# Altium PCB VET6_Coreboard.PcbDoc
Units mil, origin at the board's own origin, x right, y up, seen from the top; angles counter-clockwise.
Board outline 6000 x 4000 mil, 2 copper layers (Top Layer, Bottom Layer); 19 components, 22 nets, 136 pads, 0 vias.
Unrouted connection lines stored in the file: 46.
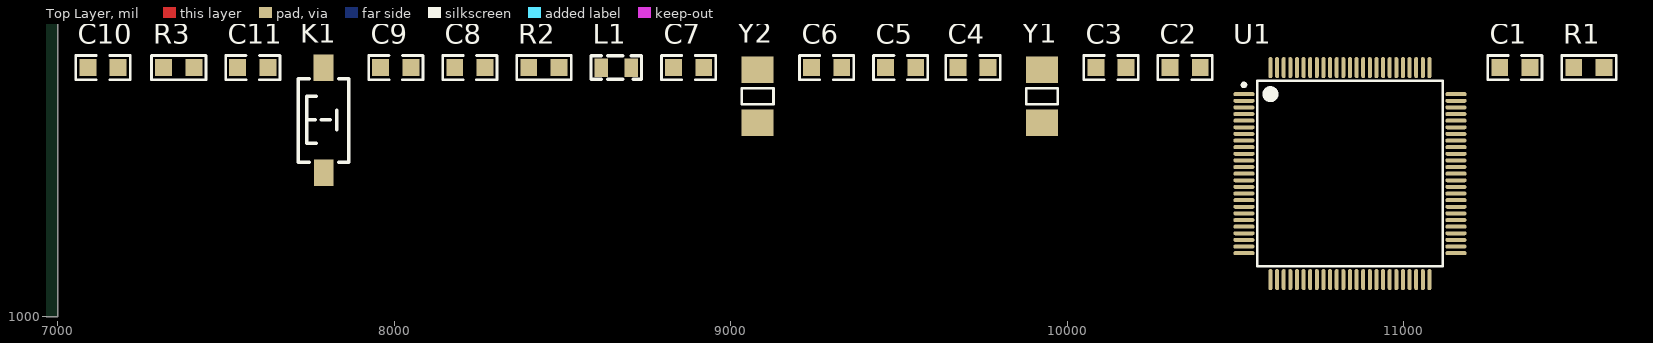
[diagram p0: Top Layer view]
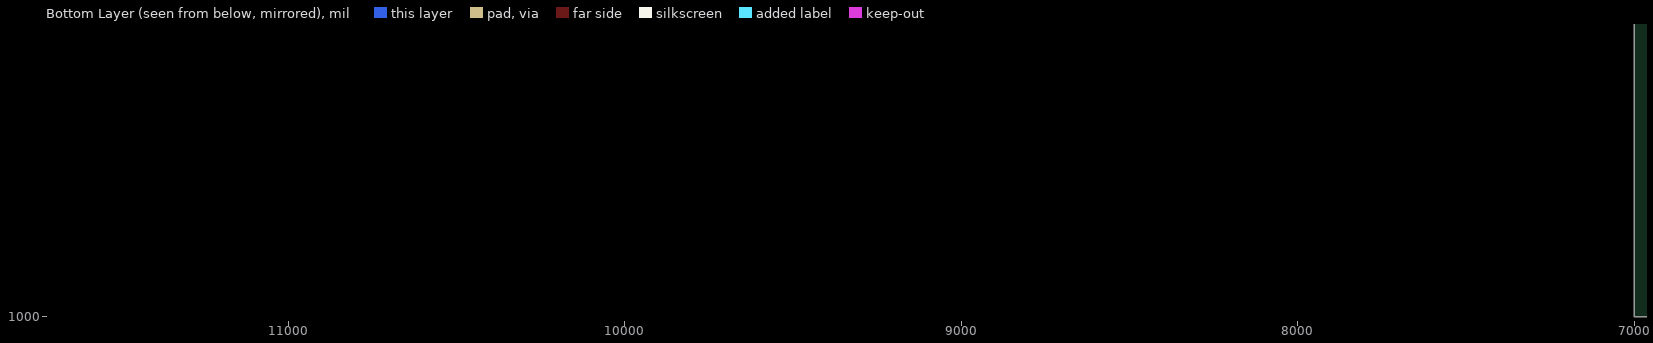
[diagram p1: Bottom Layer view, seen from below]

## Layer stack, top to bottom
Top Solder: solder mask 0.4, Solder Resist, Dk 3.5
Top Layer: signal copper 1.4
Dielectric 1: dielectric 12.6, FR-4, Dk 4.8
Bottom Layer: signal copper 1.4
Bottom Solder: solder mask 0.4, Solder Resist, Dk 3.5

## Board outline
1000,1000 7000,1000 7000,5000 1000,5000

## Design rules (kind name [scope] priority, off if disabled: settings)
Clearance [All] p1: gap=10
PolygonConnect [All] p1: connectstyle=Relief reliefconductorwidth=10 reliefentries=4 polygonreliefangle="90 Angle" airgapwidth=10
RoomDefinition VET6_Coreboard [InComponentClass('VET6_Coreboard')] p1: confinementstyle=ConfineIn formatcopy=TRUE lockcomponents=FALSE outline 7045,1060 11640,1060 11640,1890 7045,1890
RoutingVias [All] p1: holewidth=28 width=50 viastyle="Through Hole" minholewidth=28 minwidth=50 maxholewidth=28 maxwidth=50
SolderMaskExpansion [All] p1: expansion=4
Width [All] p1: maxlimit=10 minlimit=10 preferedwidth=10
30 further rules are at their usual default settings.

## Components (designator, comment, footprint, x,y, rotation, side; value= is the part's Value field where it differs from the comment)
C1 "104" "C 0805" 11330,1740 r0 top
C2 "104" "C 0805" 10350,1740 r0 top
C3 "22pf" "C 0805" 10130,1740 r0 top
C4 "22pf" "C 0805" 9720,1740 r0 top
C5 "104" "C 0805" 9505,1740 r0 top
C6 "22pf" "C 0805" 9285,1740 r0 top
C7 "22pf" "C 0805" 8875,1740 r0 top
C8 "104" "C 0805" 8225,1740 r0 top
C9 "104" "C 0805" 8005,1740 r0 top
C10 "104" "C 0805" 7135,1740 r0 top
C11 "104" "C 0805" 7580,1740 r0 top
K1 "Key" "KEY 3.6*2.5 SMD" 7790,1585 r90 top
L1 "100uH" "L 0805" 8660,1740 r0 top
R1 "10k" "R 0805" 11550,1740 r0 top
R2 "10k" "R 0805" 8445,1740 r0 top
R3 "10k" "R 0805" 7360,1740 r0 top
U1 "STM32F103VET6" TQFP100N50P14X14X1.2 10840,1425 r0 top
Y1 "32.768KHz" XTAL-5032 9925,1655 r90 top
Y2 "8MKz" XTAL-5032 9080,1655 r90 top

## Footprints (in the part's own frame and the unit in brackets; to place one, negate y for a bottom-side part, rotate by r counter-clockwise, add the part's x,y. Pads: shape width x height; smd on the part's side, far side on the other; paste and mask are expansions set on the pad)
"C 0805" [mil]
  rect 50x50 smd: 1(-45,0) 2(45,0)
  silkscreen extent -81,-36 81,36, body extent -39,-24 39,24, height 20
"KEY 3.6*2.5 SMD" [mm]
  rect 2x1.5 smd: 1(-3.996,-0.02) 2(3.937,0)
  silkscreen extent -3.21,-1.9 3.09,1.9, body extent -4,-1.88 4,1.62, height 2.59
"L 0805" [mil]
  rect 40x55 smd: 1(-45,0) 2(45,0)
  silkscreen extent -75,-35 75,35, body extent -39,-24 39,24, height 35
"R 0805" [mil]
  rect 50x50 smd: 1(-45,0) 2(45,0)
  silkscreen extent -81,-36 81,36, body extent -39,-25 39,25, height 20
TQFP100N50P14X14X1.2 [mm]
  oval 1.6x0.3 smd: 1(-8,6) 2(-8,5.5) 3(-8,5) 4(-8,4.5) 5(-8,4) 6(-8,3.5) 7(-8,3) 8(-8,2.5) 9(-8,2) 10(-8,1.5) 11(-8,1) 12(-8,0.5) 13(-8,0) 14(-8,-0.5) 15(-8,-1) 16(-8,-1.5) 17(-8,-2) 18(-8,-2.5) 19(-8,-3) 20(-8,-3.5) 21(-8,-4) 22(-8,-4.5) 23(-8,-5) 24(-8,-5.5) 25(-8,-6) 51(8,-6) 52(8,-5.5) 53(8,-5) 54(8,-4.5) 55(8,-4) 56(8,-3.5) 57(8,-3) 58(8,-2.5) 59(8,-2) 60(8,-1.5) 61(8,-1) 62(8,-0.5) 63(8,0) 64(8,0.5) 65(8,1) 66(8,1.5) 67(8,2) 68(8,2.5) 69(8,3) 70(8,3.5) 71(8,4) 72(8,4.5) 73(8,5) 74(8,5.5) 75(8,6)
  oval 0.3x1.6 smd: 26(-6,-8) 27(-5.5,-8) 28(-5,-8) 29(-4.5,-8) 30(-4,-8) 31(-3.5,-8) 32(-3,-8) 33(-2.5,-8) 34(-2,-8) 35(-1.5,-8) 36(-1,-8) 37(-0.5,-8) 38(0,-8) 39(0.5,-8) 40(1,-8) 41(1.5,-8) 42(2,-8) 43(2.5,-8) 44(3,-8) 45(3.5,-8) 46(4,-8) 47(4.5,-8) 48(5,-8) 49(5.5,-8) 50(6,-8) 76(6,8) 77(5.5,8) 78(5,8) 79(4.5,8) 80(4,8) 81(3.5,8) 82(3,8) 83(2.5,8) 84(2,8) 85(1.5,8) 86(1,8) 87(0.5,8) 88(0,8) 89(-0.5,8) 90(-1,8) 91(-1.5,8) 92(-2,8) 93(-2.5,8) 94(-3,8) 95(-3.5,8) 96(-4,8) 97(-4.5,8) 98(-5,8) 99(-5.5,8) 100(-6,8)
  silkscreen extent -8.12,-7 7,7, body extent -7,-7 7,7, height 1.2
XTAL-5032 [mm]
  rect 2x2.4 smd: 1(-2,0) 2(2,0)
  silkscreen extent -0.6,-1.2 0.6,1.2, body extent -2.6,-1.7 2.6,1.7, height 3.4

## Part data
C1 C2 C3 C4 C5 C6 C7 C8 C9 C10 C11: library part Cap, "无极性电容"
K1: "按键"
L1: library part Inductor, "电感"
R1 R2 R3: library part Resistor, "电阻"
U1: library part STM32F103RBT6
Y1 Y2: library part XTAL, "晶振"

## Nets (pads, with @x,y where several pads share a name; then routed paths per layer and width w, separated by ;. In a path a pad name is that pad's centre, name@x,y a point inside that pad or via, vN(x,y) a via of type N, cw(c..) or ccw(c..) an arc to the next point about the centre after c; other vN are vias at no path point)
ANL_REF: C8.1 L1.2 U1.21 U1.22
CAN_RX: U1.70
CAN_TX: U1.71
GND_D: C1.2 C2.1 C3.2 C4.2 C5.1 C6.1 C7.2 C8.2 C9.2 C10.2 C11.2 K1.1 R1.2 R3.2 U1.10 U1.19 U1.20 U1.27 U1.49 U1.74 U1.99
KEY1: U1.3
KEY2: U1.2
KEY3: U1.1
LED1: U1.53
LED2: U1.51
LED3: U1.56
NetC3_1: C3.1 U1.8 Y1.2
NetC4_1: C4.1 U1.9 Y1.1
NetC6_2: C6.2 U1.12 Y2.2
NetC7_1: C7.1 U1.13 Y2.1
NetC10_1: C10.1 U1.28
NetR1_1: R1.1 U1.94
NetR3_1: R3.1 U1.37
RESET: C9.1 K1.2 R2.2 U1.14
SWDIO: U1.72
USART4_RX: U1.79
USART4_TX: U1.78
VCC_3V3: C1.1 C2.2 C5.2 C11.1 L1.1 R2.1 U1.11 U1.50 U1.75 U1.100
pads on no net: U1.4 U1.5 U1.6 U1.7 U1.15 U1.16 U1.17 U1.18 U1.23 U1.24 U1.25 U1.26 U1.29 U1.30 U1.31 U1.32 U1.33 U1.34 U1.35 U1.36 U1.38 U1.39 U1.40 U1.41 U1.42 U1.43 U1.44 U1.45 U1.46 U1.47 U1.48 U1.52 U1.54 U1.55 U1.57 U1.58 U1.59 U1.60 U1.61 U1.62 U1.63 U1.64 U1.65 U1.66 U1.67 U1.68 U1.69 U1.73 U1.76 U1.77 U1.80 U1.81 U1.82 U1.83 U1.84 U1.85 U1.86 U1.87 U1.88 U1.89 U1.90 U1.91 U1.92 U1.93 U1.95 U1.96 U1.97 U1.98